# Altium PCB WheelLED_Light_Pcb.PcbDoc
Units mil, origin at the board's own origin, x right, y up, seen from the top; angles counter-clockwise.
Board outline 4466.37 x 8646.57 mil, 2 copper layers (Top Layer, Bottom Layer); 44 components, 39 nets, 132 pads, 72 vias.
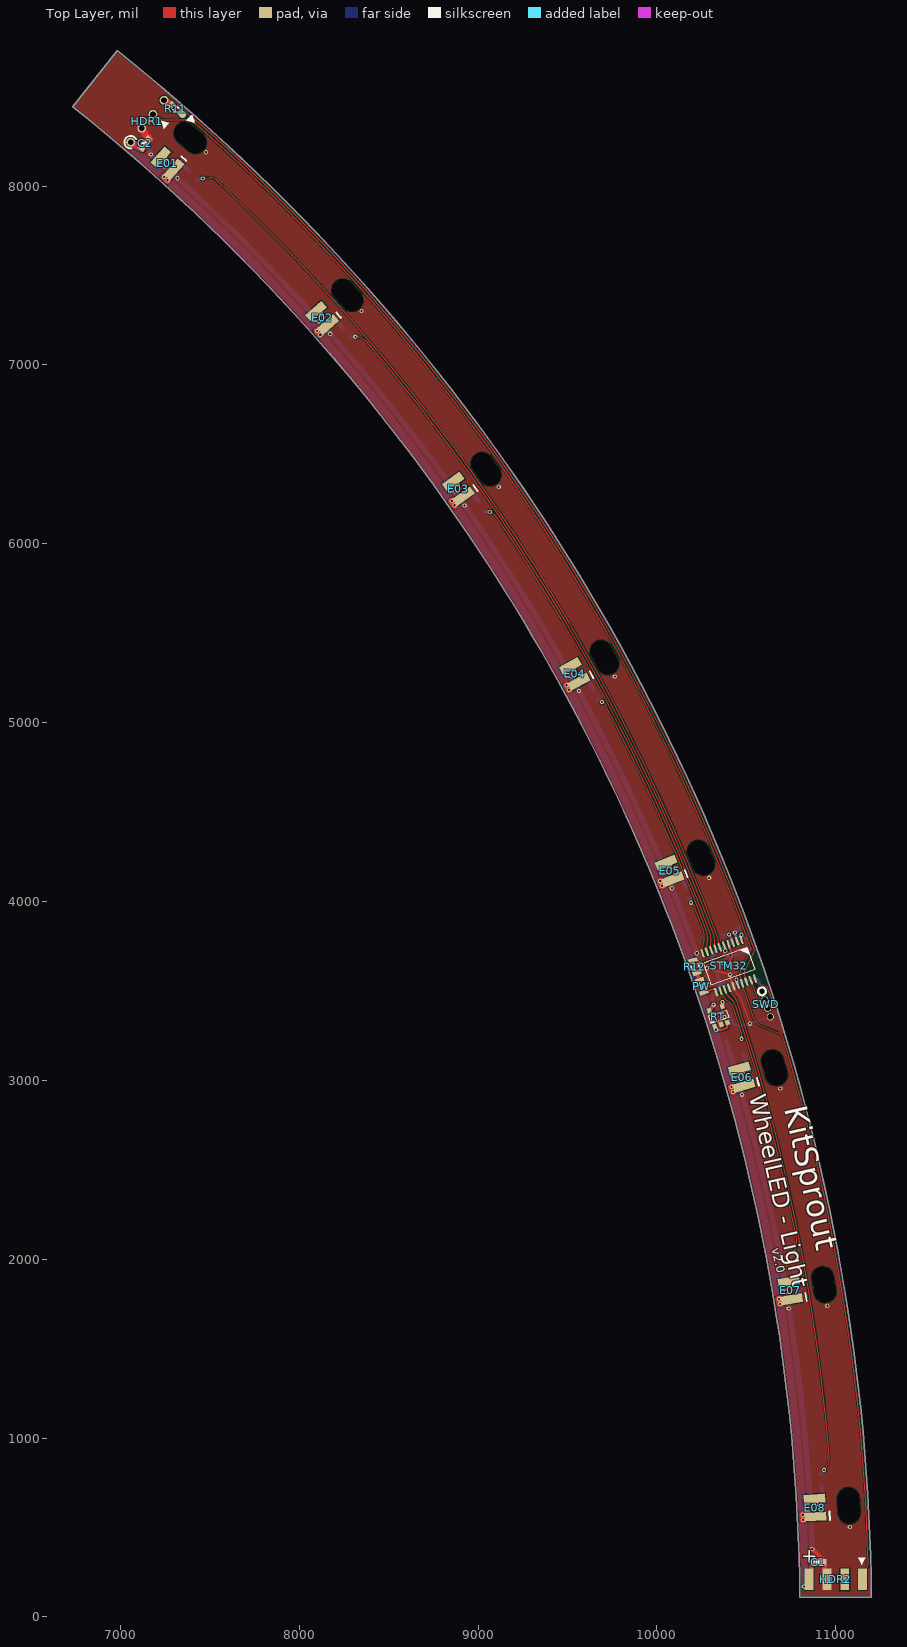
[diagram p0: Top Layer view]
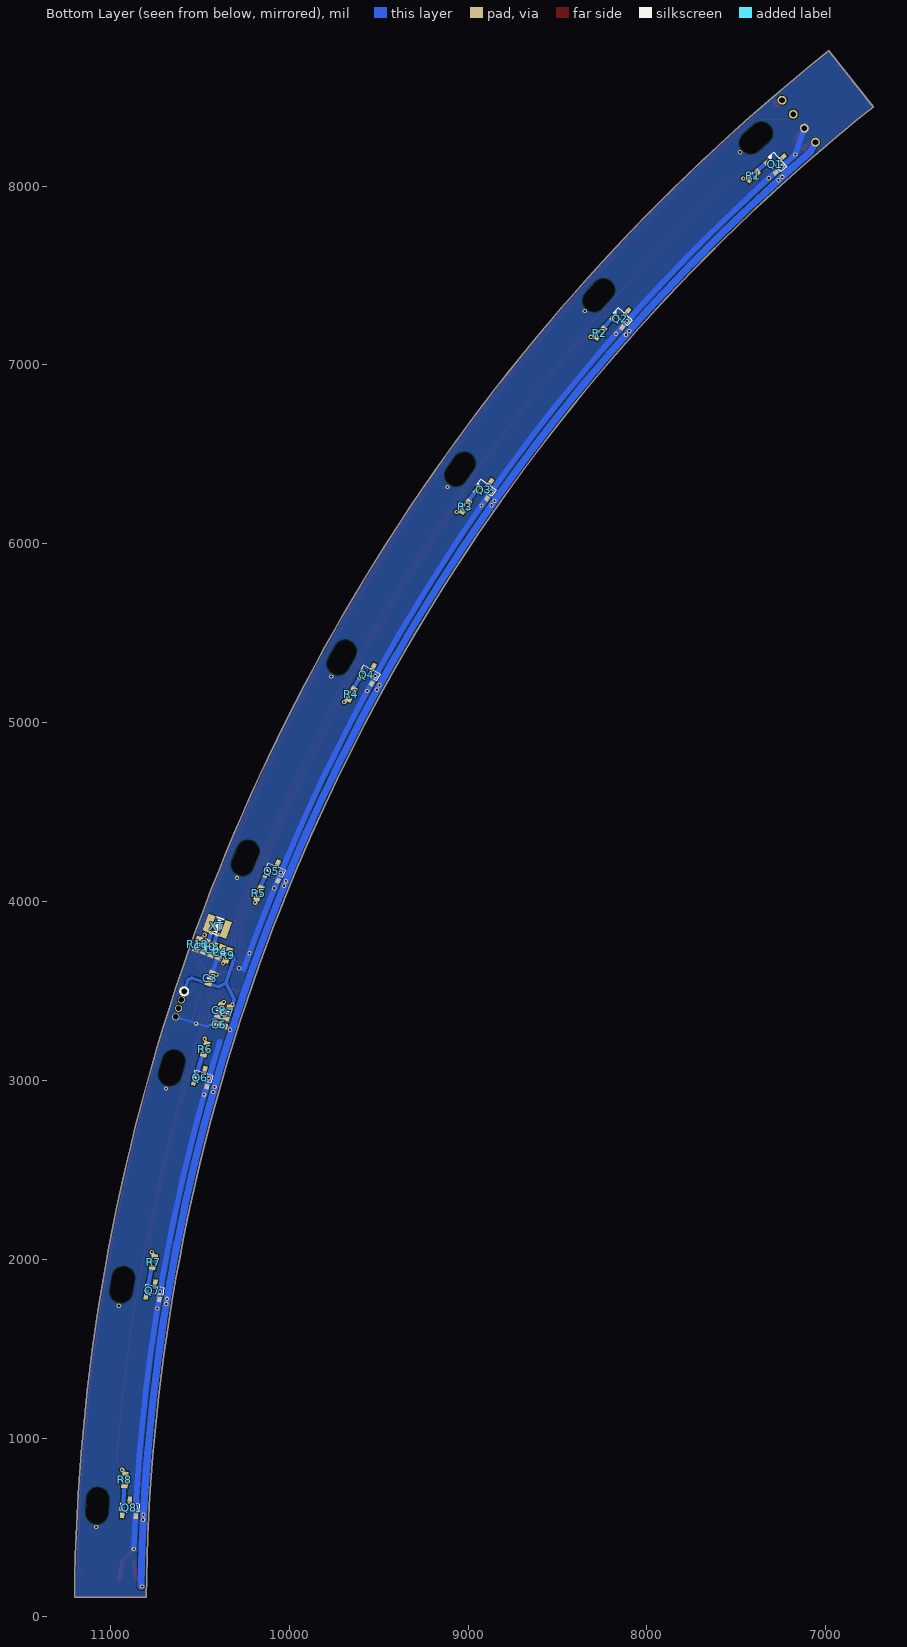
[diagram p1: Bottom Layer view, seen from below]
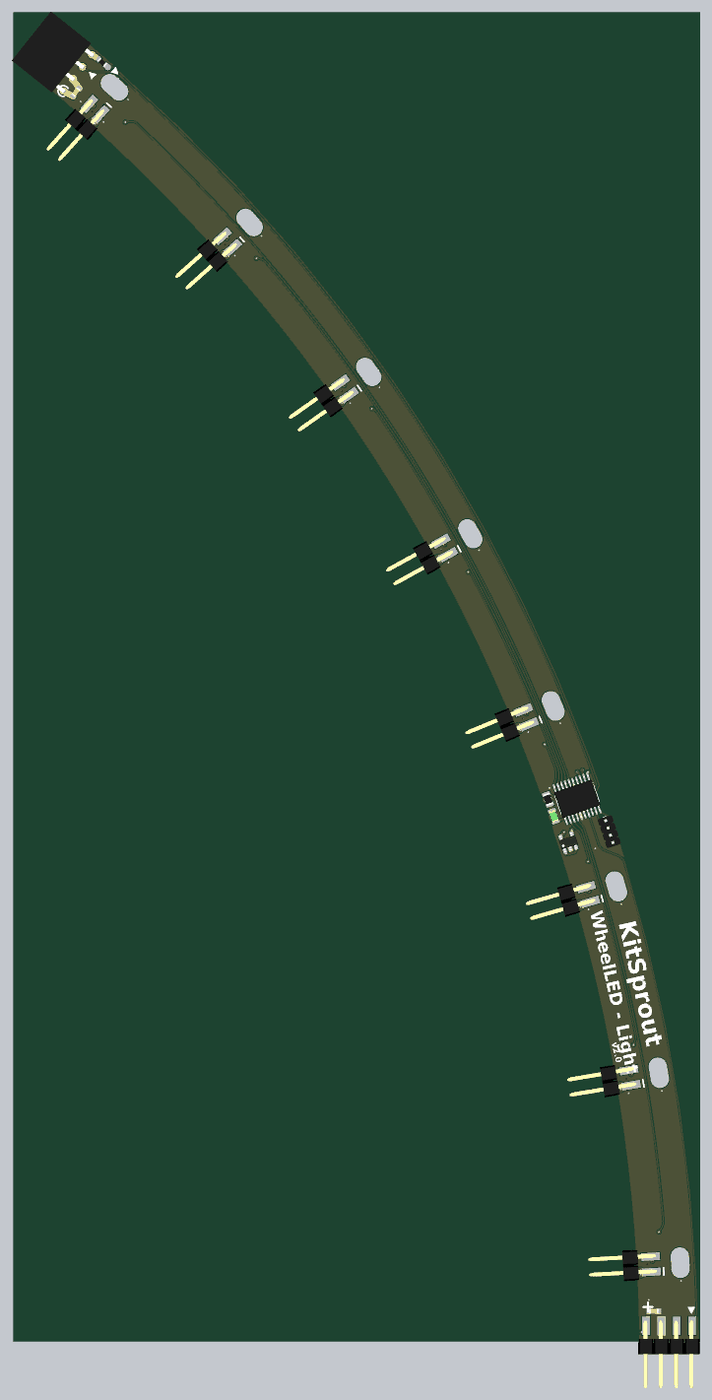
[diagram p2: 3D render of the assembled board from above, using the file's embedded part models]
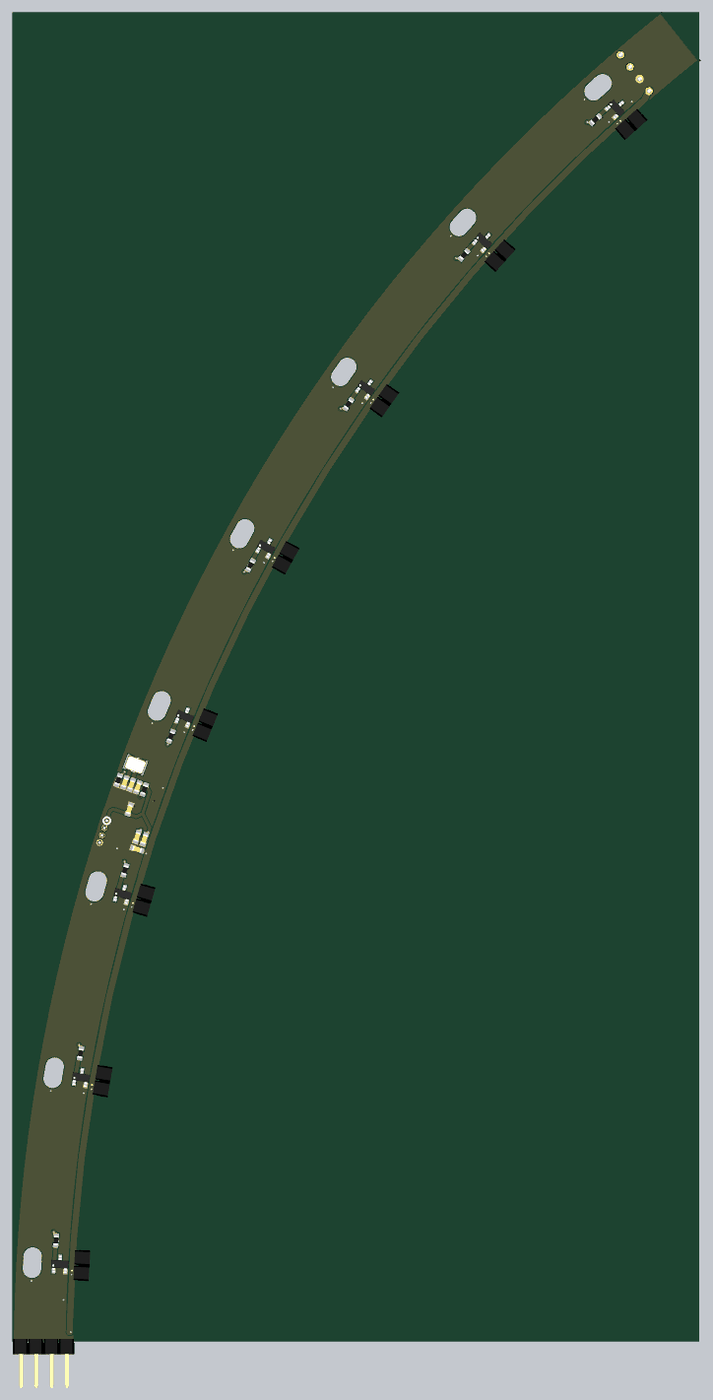
[diagram p3: 3D render of the assembled board from below, using the file's embedded part models]

## Layer stack, top to bottom
Top Solder: solder mask 0.4, Solder Resist, Dk 3.5
Top Layer: signal copper 1.4
Dielectric1: dielectric 12.6, FR-4, Dk 4.8
Bottom Layer: signal copper 1.4
Bottom Solder: solder mask 0.4, Solder Resist, Dk 3.5

## Board outline
10799.44,109.99 ccw(c0,0) 6733.63,8443.83 6983.02,8756.56 cw(c0,0) 11199.46,109.99 11200,110

## Design rules (kind name [scope] priority, off if disabled: settings)
Clearance ClearancePolygon [InPolygon] p1: gap=6
Clearance [All] p2: gap=6
ComponentClearance [All] p1: gap=0 collisioncheckmode=3 verticalgap=0 showdistances=FALSE
Height [All] p1: minheight=0 maxheight=5000 prefheight=500
HoleSize [All] p1: absolutevalues=TRUE maxlimit=200 minlimit=1 maxpercent=80.000 minpercent=20.000
HoleToHoleClearance [All] p1: gap=6 allowstackedmicrovias=TRUE
MinimumSolderMaskSliver [All] p1: minsoldermaskwidth=4
PlaneConnect [All] p1: planeconnectstyle=Direct reliefexpansion=20 reliefentries=4 reliefconductorwidth=20 reliefairgap=10
PolygonConnect [All] p1: connectstyle=Direct reliefconductorwidth=20 reliefentries=4 polygonreliefangle="90 Angle" airgapwidth=10
RoutingVias [All] p1: holewidth=12 width=20 viastyle="Through Hole" minholewidth=12 minwidth=20 maxholewidth=100 maxwidth=200
SilkToSilkClearance [All] p1: silktosilkclearance=0
SilkToSolderMaskClearance SilkscreenOverComponentPads [IsPad] p1: minsilkscreentomaskgap=1 clearancetoexposedcopper=TRUE
SolderMaskExpansion [All] p1: expansion=2
Width [All] p1: maxlimit=64 minlimit=6 preferedwidth=10
22 further rules are at their usual default settings.

## Components (designator, comment, footprint, x,y, rotation, side; value= is the part's Value field where it differs from the comment)
C1 "Cap_0603" CAP_0603 10900.71,305.84 r180 top
C2 "Cap_0603" CAP_0603 7138.48,8238.56 r231.43 top
C3 "Cap_0603" CAP_0603 10441.05,3571.5 r288.88 bottom
C4 "Cap_0603" CAP_0603 10385.23,3715.9 r109.69 bottom
C6 "Cap_0603" CAP_0603 10390.01,3311.59 r197.68 bottom
C7 "Cap_0603" CAP_0603 10342.77,3376.61 r108.08 bottom
C8 "Cap_0603" CAP_0603 10390.3,3392.13 r108.08 bottom
C9 "Cap_0603" CAP_0603 10427.6,3731.06 r289.69 bottom
C10 "Cap_0603" CAP_0603 10469.97,3746.22 r289.69 bottom
E01 "HDR1x2_2.54" HDR1X2_2.54_180H 7263.18,8127.5 r228.21 top locked
E02 "HDR1x2_2.54" HDR1X2_2.54_180H 8127.5,7263.18 r221.79 top locked
E03 "HDR1x2_2.54" HDR1X2_2.54_180H 8889.61,6307.52 r215.36 top
E04 "HDR1x2_2.54" HDR1X2_2.54_180H 9539.94,5272.54 r208.93 top locked
E05 "HDR1x2_2.54" HDR1X2_2.54_180H 10070.29,4171.25 r202.5 top locked
E06 "HDR1x2_2.54" HDR1X2_2.54_180H 10474,3017.51 r196.07 top locked
E07 "HDR1x2_2.54" HDR1X2_2.54_180H 10745.99,1825.82 r189.64 top locked
E08 "HDR1x2_2.54" HDR1X2_2.54_180H 10882.85,611.17 r183.21 top locked
HDR1 "HDR1x4_2.54" HDR1X4_2.54_90F 7057.08,8245.51 r141.43 top
HDR2 "HDR1x4_2.54" HDR1X4_2.54_180H 11150,210 r270 top
PW "LED_0805" LED_0805_GREEN 10250.37,3526.42 r288.98 top
Q1 "BJT_NPN" SOT23-3 7269.84,8134.96 r138.21 bottom
Q2 "BJT_NPN" SOT23-3 8134.96,7269.84 r131.79 bottom
Q3 "BJT_NPN" SOT23-3 8897.77,6313.3 r125.36 bottom
Q4 "BJT_NPN" SOT23-3 9548.69,5277.37 r118.93 bottom
Q5 "BJT_NPN" SOT23-3 10079.53,4175.08 r112.5 bottom
Q6 "BJT_NPN" SOT23-3 10483.61,3020.28 r106.07 bottom
Q7 "BJT_NPN" SOT23-3 10755.85,1827.49 r99.64 bottom
Q8 "BJT_NPN" SOT23-3 10892.84,611.73 r93.21 bottom
R1 "Res_0603" RES_0603 7406.49,8058.34 r138.2 bottom
R2 "Res_0603" RES_0603 8262.16,7178.41 r130.98 bottom
R3 "Res_0603" RES_0603 9014.58,6207.28 r124.55 bottom
R4 "Res_0603" RES_0603 9652.76,5159.19 r118.12 bottom
R5 "Res_0603" RES_0603 10169.4,4046.76 r111.7 bottom
R6 "Res_0603" RES_0603 10469.09,3175.18 r286.88 bottom
R7 "Res_0603" RES_0603 10758.56,1984.15 r280.45 bottom
R8 "Res_0603" RES_0603 10918.14,766.33 r274.02 bottom
R9 "Res_0603" RES_0603 10342.86,3700.73 r289.69 bottom
R10 "Res_0603" RES_0603 10512.34,3761.38 r289.69 bottom
R11 "Res_0603" RES_0603 7310.59,8432.14 r319.08 top
R12 "Res_0805" RES_0805 10211.9,3636.29 r109.6 top
RT "RT9193" SOT23-5 10343.92,3356.93 r107.98 top
STM32 "STM32F03xF" TSSOP_E170_P0.65_20 10401.59,3639.68 r289.29 top locked
SWD "HDR1x4_1.27" HDR1X4_1.27_180 10587.24,3497.55 r18.28 top
XT "XTAL_3225_2P" XT_3225_2 10401.47,3861.15 r200.37 bottom

## Footprints (in the part's own frame and the unit in brackets; to place one, negate y for a bottom-side part, rotate by r counter-clockwise, add the part's x,y. Pads: shape width x height; smd on the part's side, far side on the other; paste and mask are expansions set on the pad)
CAP_0603 [mil]
  rect 28x36 smd: 1(-32,0) 2(32,0)
  silkscreen extent -10,-16 10,16, body extent -31,-16 32,16, height 36
HDR1X2_2.54_180H [mil]
  rect 120x50 smd: 1(0,50) 2(0,-50)
  body extent -35,-100 406,100, height 61
HDR1X4_1.27_180 [mil]
  round 40 hole 30: 1(0,0) 2(0,-50) 3(0,-100) 4(0,-150)
  body extent -49,-175 49,25, height 210
HDR1X4_2.54_90F [mil]
  round 50 hole 32: 1(0,0) 2(0,-100) 3(0,-200) 4(0,-300)
  body extent -10,-355 386,55, height 99
HDR1X4_2.54_180H [mil]
  rect 120x50 smd: 1(0,0) 2(0,-100) 3(0,-200) 4(0,-300)
  body extent -35,-350 406,50, height 61
LED_0805_GREEN [mil]
  rect 26x52 smd: 1(-36,0) 2(36,0)
  silkscreen extent -12,-25 12,24, body extent -40,-25 40,25, height 43
RES_0603 [mil]
  rect 28x36 smd: 1(-32,0) 2(32,0)
  silkscreen extent -10,-16 10,16, body extent -31,-16 32,16, height 20
RES_0805 [mil]
  rect 26x52 smd: 1(-36,0) 2(36,0)
  silkscreen extent -12,-25 12,25, body extent -39,-24 39,24, height 24
SOT23-3 [mil]
  rect 30x24 smd: 1(-47,38) 2(-47,-38) 3(47,0)
  silkscreen extent -21,-53 21,53, body extent -55,-57 55,57, height 51
SOT23-5 [mil]
  rect 30x24 smd: 1(-47,38) 2(-47,0) 3(-47,-38) 4(47,-38) 5(47,38)
  silkscreen extent -21,-53 21,53, body extent -55,-57 55,57, height 57
TSSOP_E170_P0.65_20 [mil]
  oval 50x12 smd: 1(-115,115.16) 2(-115,89.57) 3(-115,63.98) 4(-115,38.39) 5(-115,12.8) 6(-115,-12.8) 7(-115,-38.39) 8(-115,-63.98) 9(-115,-89.57) 10(-115,-115.16) 11(115,-115.16) 12(115,-89.57) 13(115,-63.98) 14(115,-38.39) 15(115,-12.8) 16(115,12.8) 17(115,38.39) 18(115,63.98) 19(115,89.57) 20(115,115.16)
  silkscreen extent -65,-130 65,130, body extent -126,-130 126,130, height 42
XT_3225_2 [mil]
  rect 40x100 smd: 1(-50,0) 2(50,0)
  silkscreen extent -24,-49 24,49, body extent -63,-49 63,49, height 41

## Part data
C1 C2 C3 C4 C6 C7 C8 C9 C10: "Capacitor"
E01 E02 E03 E04 E05 E06 E07 E08: library part HDR1x2_2.54T, "Header"
HDR1 HDR2 SWD: "Header"
PW: "LED"
Q1 Q2 Q3 Q4 Q5 Q6 Q7 Q8: "Transistor"
R1 R2 R3 R4 R5 R6 R7 R8 R9 R10 R11 R12: "Resistor"
RT: "Power"
STM32: "MCU"
XT: "Crystal Oscillator"

## Free pads (board coordinates)
  round 120 hole 120 slot 200 at 138.21 deg mask-120: 0(7389.78,8269.17)
  round 120 hole 120 slot 200 at 131.79 deg mask-120: 0(8269.17,7389.78)
  round 120 hole 120 slot 200 at 125.36 deg mask-120: 0(9044.57,6417.46)
  round 120 hole 120 slot 200 at 118.93 deg mask-120: 0(9706.23,5364.44)
  round 120 hole 120 slot 200 at 112.5 deg mask-120: 0(10245.82,4243.96)
  round 120 hole 120 slot 200 at 106.07 deg mask-120: 0(10656.57,3070.11)
  round 120 hole 120 slot 200 at 99.64 deg mask-120: 0(10933.31,1857.64)
  round 120 hole 120 slot 200 at 93.21 deg mask-120: 0(11072.55,621.82)
  round 40 smd: 2(7347.31,8400.16)

## Via types
v1: diameter 24, hole 12, Top Layer to Bottom Layer, 72 vias

## Nets (pads, with @x,y where several pads share a name; then routed paths per layer and width w, separated by ;. In a path a pad name is that pad's centre, name@x,y a point inside that pad or via, vN(x,y) a via of type N, cw(c..) or ccw(c..) an arc to the next point about the centre after c; other vN are vias at no path point)
3V3: C3.2 C4.2 C7.2 R9.1 R12.2 RT.5 STM32.5 STM32.16 SWD.1 | length 993.4
  Top Layer w10: R12.2@10202,3664.14 10219.02,3670.21 10253.88,3653.69 10367.36,3694.18 v1(10381.97,3725)
  Top Layer w24: RT.5 v1(10316.86,3423.34)
  Bottom Layer w20: v1(10316.86,3423.34) 10307.56,3451.26 10353.79,3543.66 ; C4.2 R9.1 10307.77,3682.44 10353.79,3543.66 ; SWD.1 10565.8,3562.2 10545.47,3572.41 C3.2 10395.55,3522.7 10353.79,3543.66
  Bottom Layer w24: v1(10316.86,3423.34) C7.2 ; C4.2 v1(10381.97,3725) ; v1(10444.16,3562.4) C3.2
BOOT: R10.1 STM32.1 | length 72.7
  Top Layer w12: v1@10466.76,3814.97 10464.81,3807.68 STM32.1 ; v1@10467.24,3812.72 v1@10471.95,3814.36
  Bottom Layer w12: R10.1@10496.91,3791.16 R10.1
  Bottom Layer w16: v1@10472.08,3814.52 R10.1@10496.91,3793.16
  other v1: 10472.76,3813.97
EXP: PW.2 STM32.11 | length 82.6
  Top Layer w12: PW.2 10317.13,3511.1 10326.29,3506.59 STM32.11
GND: C1.1 C2.1 C3.1 C4.1 C6.1 C7.1 C8.1 C9.2 C10.2 HDR1.2 HDR2.3 Q1.2 Q2.2 Q3.2 Q4.2 Q5.2 Q6.2 Q7.2 Q8.2 R10.2 RT.2 STM32.15 SWD.4 | length 10091.1
  Top Layer w6: STM32.15 10444.83,3484.51 10457.89,3479.03 10488.67,3403.74 v1@10519.32,3317.35
  Top Layer w12: v1(10278.81,3627.14) v1(10407.97,3590.84) ; v1@10403.93,3589.32 STM32.15
  Top Layer w24: HDR1.2@7109.42,8328.7 HDR1.2@7115.44,8320.7 ; RT.2 10352.21,3328.7 10360.59,3347.24 v1(10377.05,3353.45) ; v1(10868.38,379.53) 10932.71,315.2 C1.1 HDR2.3
  Top Layer w40: HDR1.2@7119.44,8318.7 C2.1@7162.43,8261.58
  Bottom Layer w12: C6.1 10460.71,3300.38 SWD.4
  Bottom Layer w20: C4.1 C9.2 C10.2 R10.2 ; C4.1@10400.12,3687.24 C3.1
  Bottom Layer w24: v1@10278.7,3627.04 v1@10278.7,3627.13 ; C7.1 10376.84,3354.08 C8.1 ; C8.1@10405.48,3363.58 C6.1
  Bottom Layer w30: HDR1.2 v1(7170.39,8176.26) ; 7298.91,8061.73 ccw(c0,0) v1(7170.39,8176.26) ; 10254.39,3621.2 ccw(c0,0) v1(7170.39,8176.26) ; 10388.65,3215.83 cw(c0,0) v1(10868.38,379.53)
  other v1: 11078.58,503.08 10857.78,611.8 10737.37,1724.65 10952.71,1739.64 10721.91,1818.29 10475.67,2919.93 10689.24,2954.35 10449.79,3011.24 10520.08,3317 10222.4,3710.55 10083.12,4073.85 10291.51,4131.94 10047.19,4161.68 9563.92,5176.59 9764.49,5257.64 9518.38,5259.85 8924.58,6214.3 8870.01,6291.94 9114.82,6317.29 8173.13,7173.95 8110.21,7245 8347.47,7301.22 7319.01,8043.49 7245,8110.21 7478.01,8189.47
LED_1: R1.1 STM32.6 | length 5301.4
  Top Layer w6: v1@7453.97,8042.51 v1(7460.49,8042.51) 7500.98,8045.89 cw(c7506.23,8005.85) 7534.79,8034.41 ; 7534.96,8034.59 cw(c0,0) 10338.19,3801.59 cw(c10184.58,3749.81) STM32.6@10346.54,3757 ; STM32.6@10344.84,3760.17 ccw(c10367.71,3760.17) STM32.6
  Bottom Layer w24: R1.1 v1(7460.49,8042.51)
LED_2: R2.1 STM32.7 | length 4028.3
  Top Layer w6: v1@8313.61,7157.67 cw(c8313.01,7068.62) 8370.7,7136.45 ; 8370.77,7136.54 cw(c0,0) 10314.92,3821.32 ; 10315.44,3821.51 cw(c10161.82,3769.72) STM32.7@10322.73,3750.01
  Bottom Layer w24: R2.1 v1(8313.61,7157.15)
LED_3: R3.1 STM32.8 | length 2783
  Top Layer w6: v1@9065.06,6178.1 cw(c9034.15,6098.7) 9104.47,6146.82 ; 9104.3,6146.71 cw(c0,0) 10293.37,3836.25 ; 10293.67,3836.36 cw(c10140.05,3784.58) STM32.8@10296.7,3742.83
  Bottom Layer w24: R3.1 v1(9064.99,6177.93)
LED_4: R4.1 STM32.9 | length 1542.2
  Top Layer w6: v1@9692.92,5116.11 cw(c9669.13,5068.68) 9715.11,5095.15 ; 9714.99,5095.08 cw(c0,0) 10275.9,3840.14 ; STM32.9@10273.12,3735.59 ccw(c10121.28,3792.37) 10276.16,3840.24
  Bottom Layer w24: R4.1 v1(9692.78,5115.83)
LED_5: R5.1 STM32.10 | length 300.1
  Top Layer w6: v1@10194.52,3987.55 cw(c10181.91,3959.61) 10210.12,3971.59 ; 10209.78,3971.46 cw(c0,0) 10254.42,3854.74 ; STM32.10@10249.38,3731 ccw(c10102.22,3799.02) 10254.46,3854.75
  Bottom Layer w24: R5.1 v1(10190.41,3993.58)
LED_6: R6.1 STM32.12 | length 286.8
  Top Layer w6: STM32.12@10362.62,3485 ccw(c10437.56,3509.22) 10396.43,3442.06 cw(c10355.3,3374.89) 10430.24,3399.11 ; 10430.11,3399.07 cw(c0,0) 10472.53,3266.05 cw(c10406.43,3248.61) v1@10472.43,3230.89
  other v1: 10472.68,3231.82
LED_7: R7.1 STM32.13 | length 1550.2
  Top Layer w6: STM32.13@10384.57,3495.5 ccw(c10459.51,3519.72) 10412.08,3456.85 cw(c10364.64,3393.98) 10439.58,3418.2 ; 10439.64,3418.22 cw(c0,0) 10780.35,2110.53 ; v1@10767.33,2040.35 ccw(c10681.93,2092.37) 10780.27,2110.52
  Bottom Layer w24: R7.1 v1(10768.55,2039.6)
LED_8: R8.1 STM32.14 | length 2788.5
  Top Layer w6: STM32.14@10409.74,3503.86 ccw(c10484.69,3528.09) 10428.79,3472.6 cw(c10372.89,3417.12) 10447.83,3441.34 cw(c0,0) 10963.81,891.6 ; v1(10934.14,822.14) 10948.05,842.09 ccw(c10877.48,891.59) 10963.68,891.59
  Bottom Layer w24: R8.1 v1(10934.14,822.14)
NetC8_2: C8.2 RT.4 | length 45.6
  Top Layer w24: RT.4 v1(10366.08,3437.97)
  Bottom Layer w24: v1(10366.08,3437.97) C8.2
NetE01_2: E01.2 Q1.3 | length 55.7
  Top Layer w24: E01.2@7234.8,8166.27 v1(7255.57,8147.69)
  Bottom Layer w24: Q1.3 v1(7255.57,8147.69)
NetE02_2: E02.2 Q2.3 | length 55.7
  Top Layer w24: E02.2@8103.64,7304.89 v1(8122.2,7284.09)
  Bottom Layer w24: Q2.3 v1(8122.2,7284.09)
NetE03_2: E03.2 Q3.3 | length 55.7
  Top Layer w24: E03.2@8870.57,6351.64 v1(8886.69,6328.89)
  Bottom Layer w24: Q3.3 v1(8886.69,6328.89)
NetE04_2: E04.2 Q4.3 | length 55.7
  Top Layer w24: E04.2@9525.95,5318.51 v1(9539.42,5294.1)
  Bottom Layer w24: Q4.3 v1(9539.42,5294.1)
NetE05_2: E05.2 Q5.3 | length 55.7
  Top Layer w24: E05.2@10061.54,4218.5 v1(10072.19,4192.74)
  Bottom Layer w24: Q5.3 v1(10072.19,4192.74)
NetE06_2: E06.2 Q6.3 | length 55.7
  Top Layer w24: E06.2@10470.6,3065.44 v1(10478.3,3038.65)
  Bottom Layer w24: Q6.3 v1(10478.3,3038.65)
NetE07_2: E07.2 Q7.3 | length 55.7
  Top Layer w24: E07.2@10747.98,1873.83 v1(10752.63,1846.35)
  Bottom Layer w24: Q7.3 v1(10752.63,1846.35)
NetE08_2: E08.2 Q8.3 | length 55.7
  Top Layer w24: E08.2@10890.2,658.65 v1(10891.75,630.82)
  Bottom Layer w24: Q8.3 v1(10891.75,630.82)
NetHDR1_4: HDR1.4 R11.1 | length 43.3
  Top Layer w40: HDR1.4 R11.1@7281.06,8457.53
NetPW_1: PW.1 R12.1 | length 42
  Top Layer w24: R12.1@10224.77,3600.13 PW.1
NetQ1_1: Q1.1 R1.2 | length 73.1
  Bottom Layer w24: Q1.1@7330.84,8131.4 R1.2@7385.99,8083.38
NetQ2_1: Q2.1 R2.2 | length 73.2
  Bottom Layer w24: Q2.1@8195.1,7259.56 R2.2@8244.93,7205.87
NetQ3_1: Q3.1 R3.2 | length 73.4
  Bottom Layer w24: Q3.1@8956.96,6295.52 R3.2@9000.52,6236.5
NetQ4_1: Q4.1 R4.2 | length 74
  Bottom Layer w24: Q4.1@9605.09,5253.85 R4.2@9642.07,5189.8
NetQ5_1: Q5.1 R5.2 | length 73.6
  Bottom Layer w24: Q5.1@10132.78,4145.81 R5.2@10162.2,4078.38
NetQ6_1: Q6.1 R6.2 | length 168
  Bottom Layer w24: R6.2@10483.16,3146.01 Q6.1
NetQ7_1: Q7.1 R7.2 | length 168.1
  Bottom Layer w24: R7.2@10769.49,1952.45 Q7.1@10801.21,1787.4
NetQ8_1: Q8.1 R8.2 | length 168
  Bottom Layer w24: R8.2 Q8.1
RST: R9.2 STM32.4 | length 141.1
  Top Layer w10: v1(10370.01,3654.15) 10408.71,3667.96 10422.57,3697.2 STM32.4
RX: pad.2 R11.2 STM32.18 | length 5918.3
  Top Layer w6: pad.2@7360.82,8404.29 cw(c7351.58,8329.12) 7399.72,8387.59 ; 7399.62,8387.48 cw(c0,0) 10545.59,3727.55 10483.87,3597.35 STM32.18
SWCLK: STM32.20 SWD.3 | length 214.7
  Top Layer w6: STM32.20 10554.41,3551.96 10613.65,3523.88 10640.47,3448.72 SWD.3
SWDIO: STM32.19 SWD.2 | length 146
  Top Layer w6: STM32.19 10555.59,3472.51 SWD.2
TX: HDR1.3 HDR2.1 STM32.17 | length 9553.2
  Top Layer w6: HDR1.3@7184.4,8399.25 ccw(c7255.11,8469.97) 7255.11,8369.97 7359,8369.97 cw(c7359,8269.96) 7424.87,8345.21 ; 7421.89,8347.73 cw(c0,0) 10526.91,3735.39 10458.75,3591.61 STM32.17 ; STM32.17@10475.2,3545.66 cw(c0,0) 10539.88,3348.51 ccw(c10611.91,3373.76) 10573.78,3307.63 10676.06,3267.38 cw(c10637.92,3201.25) 10709.95,3226.52 ; 10709.56,3226.38 cw(c0,0) 11180.77,307.43 cw(c11080.77,307.43) HDR2.1@11151.48,236.71
VIN: C1.2 C2.2 C6.2 E01.1 E02.1 E03.1 E04.1 E05.1 E06.1 E07.1 E08.1 HDR1.1 HDR2.4 RT.1 RT.3 | length 10785.5
  Top Layer w12: RT.1@10321.24,3285.58 10352.89,3279.83 10391.02,3291.91 10396.77,3323.56 RT.3@10397.19,3325.86
  Top Layer w24: HDR1.1@7047.08,8250.51 HDR1.1@7057,8245.38 ; HDR2.4 C1.2
  Top Layer w40: HDR1.1@7060,8242.38 C2.2@7121.53,8210.54 ; v1(7243.17,8051.42) 7253.49,8042.11 v1(7264.23,8032.43) ; v1(8098.65,7190.32) 8108.32,7179.41 v1(8117.45,7169.09) ; v1(8852.4,6238.9) 8861.18,6226.42 v1(8868.71,6215.7) ; v1(9494.95,5209.11) 9502.6,5195.13 v1(9508.56,5184.23) ; v1(10018.23,4113.88) 10024.52,4098.5 v1(10028.96,4087.64) ; v1(10416.95,2962.43) 10420.37,2950.37 v1(10424.67,2935.15) ; v1(10683.03,1778.14) 10685.18,1765.1 v1(10687.65,1750.17) ; v1(10814.91,571.52) 10815.62,557.64 v1(10816.37,543.2)
  Bottom Layer w24: 10318.55,3288.85 10328.08,3291.88 C6.2
  Bottom Layer w40: HDR1.1 7088.23,8188.16 cw(c0,0) v1@10828.67,169.79 ; 10305.86,3328.37 cw(c0,0) 10318.55,3288.85 ; 10305.86,3328.37 cw(c0,0) 10318.55,3288.85 ; 10305.86,3328.37 cw(c0,0) 10318.55,3288.85 ; 10305.86,3328.37 cw(c0,0) 10318.55,3288.85 ; 10318.55,3288.85 cw(c0,0) 10362.38,3148 ; 10318.55,3288.85 cw(c0,0) 10362.38,3148 ; 10318.55,3288.85 cw(c0,0) 10362.38,3148 ; 10318.55,3288.85 cw(c0,0) 10362.38,3148 ; 10318.55,3288.85 cw(c0,0) 10362.38,3148 ; 10318.55,3288.85 cw(c0,0) 10362.38,3148
  other v1: 10821.34,169.68 10330.95,3282.85
XIN: C10.1 STM32.2 XT.1 | length 143.4
  Top Layer w12: v1(10435.33,3826.99) 10432.79,3821.72 STM32.2
  Bottom Layer w24: C10.1@10453.67,3774.58 v1(10435.33,3826.99) XT.1@10458.51,3853.93
XOUT: C9.1 STM32.3 XT.2 | length 143.4
  Top Layer w12: v1(10402.45,3814.98) 10409.16,3811.75 STM32.3
  Bottom Layer w24: XT.2@10367.02,3812.33 v1(10402.45,3814.98) C9.1@10420.79,3762.57
pads on no net: HDR2.2

## Polygon pours and split planes (outlines as drawn)
GND on Top Layer "Top-GND" (solid, remove dead copper, pour order 2): 10799.44,110.08 ccw(c0,0) 6733.63,8443.83 6983.02,8756.56 cw(c0,0) 11199.46,110.05 11200,110
GND on Bottom Layer "Bottom-GND" (solid, remove dead copper, pour order 5): 10799.44,110.08 ccw(c0,0) 6733.63,8443.83 6983.02,8756.56 cw(c0,0) 11199.46,110.05 11200,110

## Keep-outs
Keep-Out Layer:
  lines w2: 10799.44,110.08 ccw(c0,0) 6733.63,8443.83 6983.02,8756.56 cw(c0,0) 11199.46,110.05 ; 10800,110 11200,110

## Silkscreen, mask and mechanical layers (free items; w line width, h text height)
Top Overlay:
  circle w10: c10587.24,3497.55 r22.8
  region: 7269.21,8353.22 7241.76,8324.12 7227.22,8365.43
  region: 7370.42,8368.34 7397.87,8397.44 7412.41,8356.14
  region: 11125.12,330.19 11165.1,331.36 11146.18,291.87
  lines w6: 7227.22,8365.43 7269.21,8353.22 7241.76,8324.12 7227.22,8365.43 ; 7370.42,8368.34 7412.41,8356.14 7397.87,8397.44 7370.42,8368.34 ; 11125.12,330.19 11165.1,331.36 11146.18,291.87 11125.12,330.19
  lines w10: 7061.58,8211.11 cw(c7057.08,8245.51) 7087.71,8261.8 ; 7339.93,8166.14 7368.39,8140.47 ; 8207.66,7293.47 8233.05,7264.8 ; 8972.25,6329.23 8997.04,6293.94 ; 9624.15,5285.46 9644.84,5247.62 ; 10155.16,4175.29 10171.48,4135.38 ; 10558.61,3012.68 10570.36,2971.19 ; 10829.42,1812.22 10837.22,1764.95 ; 10964.19,589 10966.66,541.16
  text "WheelLED - Light" at 10485.88,2901.83 h160 r282.86
  text "KitSprout" at 10670.47,2832.43 h220 r282.86
  text "v2.0" at 10625.88,2051.83 h80 r282.86
  text "+" at 10805.79,301.83 h80
Bottom Overlay:
  circle w10: c10587.24,3497.55 r22.8
Mechanical 1:
  circle w10: c0,0 r11318.9
  circle w10: c0,0 r10374.02
  circle w10: c0,0 r10767.72
  lines w2: 0,0 11318.9,0 ; 10799.44,109.99 ccw(c0,0) 6733.63,8443.83 6983.02,8756.56 cw(c0,0) 11199.46,109.99 ; 10800,0 11200,0 ; 10800,110 11200,110
Mechanical 4:
  lines w2: 7343.14,8216.98 7436.43,8321.37 ; 8216.98,7343.14 8321.37,7436.43 ; 8987.48,6376.96 9101.66,6457.97 ; 9644.96,5330.58 9767.49,5398.3 ; 10181.15,4217.17 10310.5,4270.75 ; 10589.31,3050.73 10723.84,3089.48 ; 10864.3,1845.92 11002.32,1869.37 ; 11002.66,617.9 11142.44,625.75
  lines w10: 6914.44,8670.56 cw(c0,0) 11090,0
Mechanical 13:
  circle w5: c11072.55,621.82 r130.98
  circle w5: c10933.31,1857.64 r130.98
  circle w5: c10656.57,3070.11 r130.98
  circle w5: c10245.82,4243.96 r130.98
  circle w5: c9706.23,5364.44 r130.98
  circle w5: c9044.57,6417.46 r130.98
  circle w5: c8269.17,7389.78 r130.98
  circle w5: c7389.78,8269.17 r130.98
T-Component:
  lines w2: -2492.21,10919.2 cw(c0,0) 6983.02,8756.56 6733.63,8443.83 ccw(c0,0) -2403.2,10529.23 -2492.21,10919.2 ; 6733.69,-8443.78 ccw(c0,0) 10800,0 11200,0 cw(c0,0) 6983.02,-8756.56 6733.69,-8443.78
B-Component:
  circle w393.7: c0,0 r12244.09
  lines w2: -10090.88,4859.45 cw(c0,0) -2492.21,10919.2 -2403.2,10529.23 ccw(c0,0) -9730.49,4685.9 -10090.88,4859.45

## Panel: embedded boards
"SmartBikeLight_Pcb.PcbDoc" at -18310,-21494.96, 1 rows x 1 columns, spacing 0 x 0, rotation 0
"SmartBikeLight_Pcb.PcbDoc" at -27322,-21094.96, 1 rows x 1 columns, spacing 0 x 0, rotation 0